# EAGLE board solenoid_board (EAGLE 6.3)
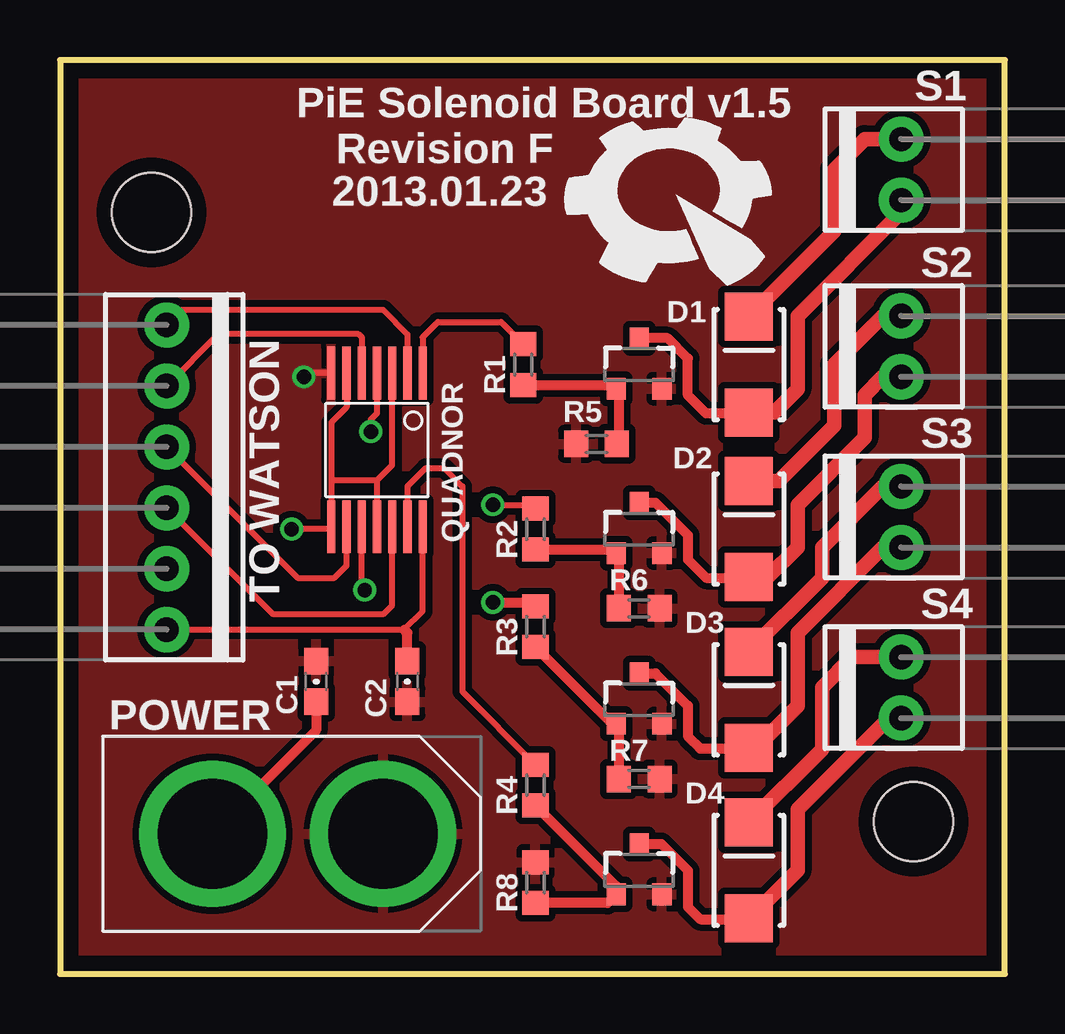
[diagram p0: board, top side]
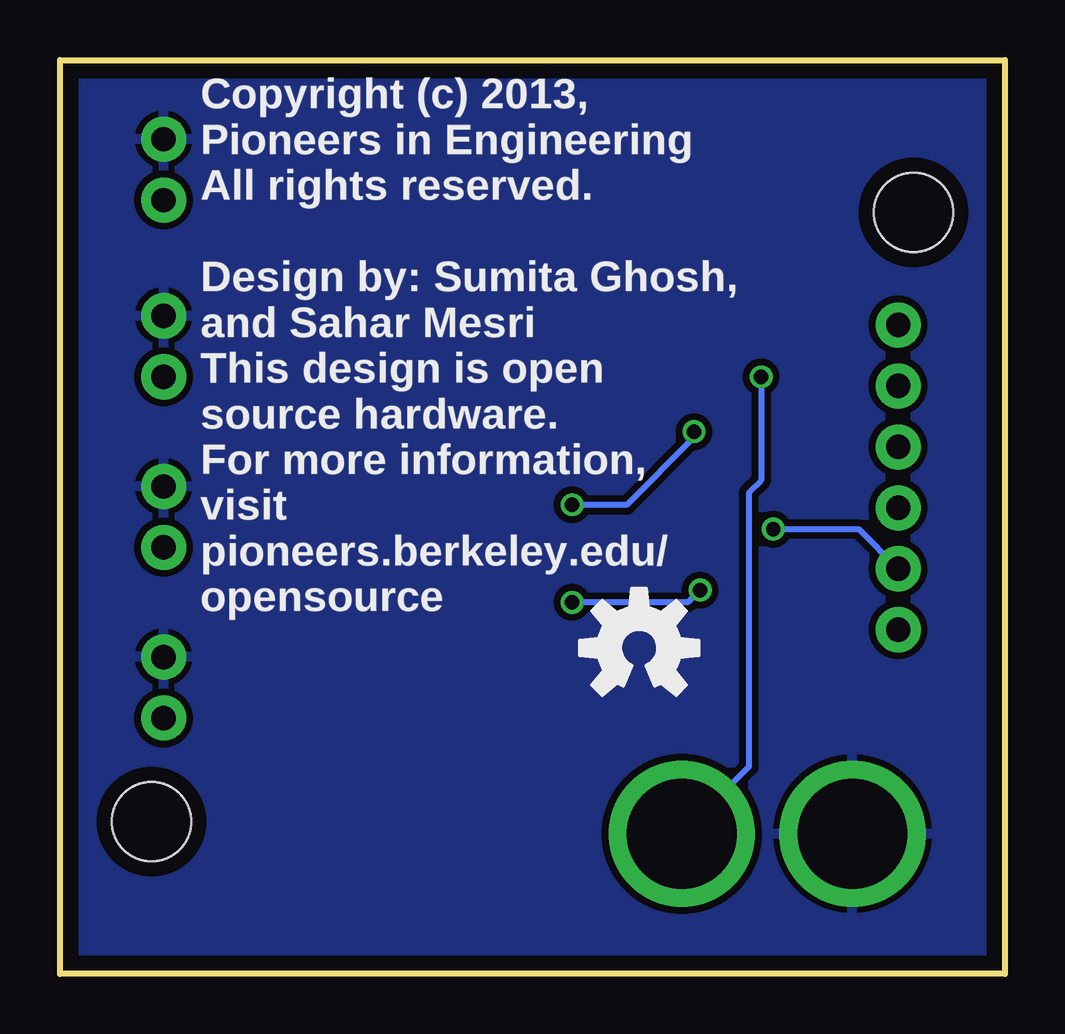
[diagram p1: board, bottom side, seen from below]

Size 39.37 x 38.1 mm. Coordinates in mm from the lower left corner, seen from the top.
Outline: 0,0 39.37,0 39.37,38.1 0,38.1 0,0
Copper layers (1*16): Top 2mil / dielectric 9mil / Bottom 2mil
Design rules "advancedcircuits-33each-pie": minimum track width 6mil, minimum drill 15mil, track to track 6mil, track to pad 10mil, pad to pad 6mil, via to via 6mil, smd to smd 6mil, copper to edge 25mil, drill to drill 7mil, minimum pad ring 7mil, minimum via ring 7mil, stop-mask expansion 3mil, vias tented up to drill 0mil, thermal gap 10mil
Net classes: 1 power: width 0.406 mm, drill 0.381 mm, clearance 0.203 mm

## Footprints (pad centres in the part's own frame; a part is rotated, then mirrored left to right if it is on the bottom)
0603-CAP = smd 1.1 x 1: 1 -0.85,0; 2 0.85,0
SMA-DIODE_ALT = smd 2 x 2: A -2,0; C 2,0
SOT23-3 = smd 0.8 x 0.9: 1 -0.95,-1; 2 0.95,-1; 3 0,1.1
QUADNOR = smd 0.35 x 2.2: 1A -1.27,-3.2; 1B -0.635,-3.2; 1Y -1.905,-3.2; 2A 0.635,-3.2; 2B 1.27,-3.2; 2Y 0,-3.2; 3A 1.905,3.2; 3B 1.27,3.2; 3Y 0.635,3.2; 4A 0,3.2; 4B -0.635,3.2; 4Y -1.27,3.2; GND 1.905,-3.2; VCC -1.905,3.2
R0603 = smd 1 x 1.1: 1 -0.85,0; 2 0.85,0
1X02-MTA = drill 1.016 pad 1.88: 1 -1.27,0; 2 1.27,0
XT60CONNECTOR = drill 4.572 pad 6.096: 12V -3.556,0; GND 3.556,0
STAND-OFF = hole 3.302: 0,0
1X06-MTA = drill 1.016 pad 1.88: 1 -6.35,0; 2 -3.81,0; 3 -1.27,0; 4 1.27,0; 5 3.81,0; 6 6.35,0

## Placement (x,y rotation side)
C1  0.1uF  [0603-CAP]  10.67,12.19 90 top
C2  0.1uF  [0603-CAP]  14.48,12.19 270 top
D1  [SMA-DIODE_ALT]  28.7,25.4 90 top
D2  [SMA-DIODE_ALT]  28.7,18.54 90 top
D3  [SMA-DIODE_ALT]  28.7,11.43 90 top
D4  [SMA-DIODE_ALT]  28.7,4.32 90 top
Q1  MOSFET-NCHANNELSMD  [SOT23-3]  24.13,25.4 0 top
Q2  MOSFET-NCHANNELSMD  [SOT23-3]  24.13,18.54 0 top
Q3  MOSFET-NCHANNELSMD  [SOT23-3]  24.13,11.43 0 top
Q4  MOSFET-NCHANNELSMD  [SOT23-3]  24.13,4.32 0 top
QUADNOR  SN74HC02DBR  [QUADNOR]  13.21,21.84 180 top
R1  330  [R0603]  19.3,25.4 90 top
R2  330  [R0603]  19.81,18.54 270 top
R3  330  [R0603]  19.81,14.48 270 top
R4  330  [R0603]  19.81,7.87 270 top
R5  10k  [R0603]  22.35,22.1 0 top
R6  10k  [R0603]  24.13,15.24 180 top
R7  10k  [R0603]  24.13,8.13 180 top
R8  10k  [R0603]  19.81,3.81 270 top
S1  [1X02-MTA]  35.05,33.53 90 top
S2  [1X02-MTA]  35.05,26.16 90 top
S3  [1X02-MTA]  35.05,19.05 90 top
S4  [1X02-MTA]  35.05,11.94 90 top
U$1  [PIE-LOGO-SMALL]  25.65,32.51 0 top
U$2  XT60CONNECTOR  [XT60CONNECTOR]  9.91,5.84 0 top
U$3  Mounting + Test  [STAND-OFF]  3.81,31.75 0 top
U$4  Mounting + Test  [STAND-OFF]  35.56,6.35 0 top
U$5  [OSHW-LOGO-M]  15.24,13.59 0 bottom
WATSON  [1X06-MTA]  4.45,20.7 270 top

## Library data of the parts
C1 C2 D1-D4 Q1-Q4 R1-R8 U$1 U$3-U$5 = pie
QUADNOR = pie; PARTNUMBER: 296-8204-1-ND
S1-S4 = pie; PARTNUMBER: A1921-ND
U$2 = pie; PARTNUMBER: PRT-10474
WATSON = pie; PARTNUMBER: A1923-ND

## Nets
12V [power]: C1.1 D1.C D2.C D3.C D4.C S1.2 S2.2 S3.2 S4.2 U$2.12V
GATE1: QUADNOR.1Y R1.2
GATE2: QUADNOR.2Y R2.1
GATE3: QUADNOR.3Y R3.1
GATE4: QUADNOR.4Y R4.1
GND: C1.2 C2.2 Q1.2 Q2.2 Q3.2 Q4.2 QUADNOR.GND R5.1 R6.1 R7.1 R8.1 U$2.GND
IO21: QUADNOR.3B WATSON.3
IO61: QUADNOR.1B QUADNOR.2B QUADNOR.3A QUADNOR.4A WATSON.5
IO63: QUADNOR.2A WATSON.2
IO64: QUADNOR.1A WATSON.1
IO65: QUADNOR.4B WATSON.4
N$2: D1.A Q1.3 S1.1
N$3 [power]: D4.A Q4.3 S4.1
N$4 [power]: D3.A Q3.3 S3.1
N$8 [power]: D2.A Q2.3 S2.1
N$15: Q1.1 R1.1 R5.2
N$16: Q2.1 R2.2 R6.2
N$17: Q3.1 R3.2 R7.2
N$18: Q4.1 R4.2 R8.2
VCC: C2.1 QUADNOR.VCC WATSON.6

## Tracks (layer width: path | path; a pad name or v marks a point on that pad's centre or on a via)
12V
  Top 0.406: C1.1 10.67,10.16 U$2.12V
  Top 0.61: D1.C 32.26,30.96 32.26,33.53 33.53,34.8 S1.2 | D2.C 29.94,20.54 32.26,22.86 32.26,25.4 34.29,27.43 S2.2 | D3.C 28.7,13.46 31.75,16.51 31.75,17.78 34.29,20.32 S3.2 | D4.C 31.75,9.37 31.75,11.94 33.02,13.21 S4.2
  pour Bottom (isolate 0.279): 0,38.1 39.37,38.1 39.37,0 0,0
GATE1
  Top 0.254: R1.2 18.38,27.18 15.75,27.18 15.11,26.54 QUADNOR.1Y
GATE2  (via drill 0.6)
  Top 0.254: v18.03,19.56 19.65,19.56 R2.1 | QUADNOR.2Y 13.21,23.37 12.95,23.11 v12.95,22.61
  Bottom 0.254: v12.95,22.61 12.95,22.35 15.75,19.56 v18.03,19.56
GATE3  (via drill 0.6)
  Top 0.254: v12.7,16 12.57,16.13 QUADNOR.3Y
  Top 0.406: v18.03,15.49 19.65,15.49 R3.1
  Bottom 0.254: v18.03,15.49 13.21,15.49 v12.7,16
GATE4
  Top 0.254: 14.54,18.61 14.48,18.54 QUADNOR.4Y 14.48,20.32 15.24,21.08 16,21.08 16.76,20.32 16.76,11.77 R4.1
GND  (via drill 0.6)
  Top 0.254: QUADNOR.GND 10.31,25.04 v10.16,24.89
  Bottom 0.254: v10.16,24.89 10.16,20.57 10.67,20.07 10.67,8.64 U$2.GND
  pour Top (isolate 0.279): 0,38.1 0,0 39.37,0 39.37,38.1
IO21
  Top 0.254: WATSON.3 9.91,16.51 11.43,16.51 11.94,17.02 11.94,18.58 QUADNOR.3B
IO61  (via drill 0.6)
  Top 0.254: 13.21,20.57 QUADNOR.4A | v9.65,18.54 11.2,18.54 QUADNOR.3A 11.3,20.57 | 11.3,20.57 11.3,22.99 11.94,23.62 QUADNOR.2B | 13.21,20.57 11.3,20.57 | 13.21,20.57 13.84,21.21 QUADNOR.1B
  Bottom 0.254: v9.65,18.54 6.1,18.54 WATSON.5
IO63
  Top 0.254: WATSON.2 6.6,26.67 12.45,26.67 12.57,26.54 QUADNOR.2A
IO64
  Top 0.254: QUADNOR.1A 14.48,25.11 14.48,26.67 13.46,27.69 5.08,27.69 WATSON.1
IO65
  Top 0.254: WATSON.4 8.89,14.99 13.46,14.99 13.84,15.37 QUADNOR.4B
N$2
  Top 0.406: D1.A 28.67,23.37 26.92,23.37 26.16,24.13 26.16,25.65 25.32,26.5 Q1.3
  Top 0.61: D1.A 29.75,23.4 30.73,24.38 30.73,27.43 35.05,31.75 S1.1
N$3
  Top 0.406: Q4.3 25.06,5.42 26.16,4.32 26.16,2.79 26.67,2.29 28.67,2.29 D4.A
  Top 0.61: D4.A 28.73,2.32 30.73,4.32 30.73,6.86 34.54,10.67 S4.1
N$4
  Top 0.406: Q3.3 24.81,12.53 26.16,11.18 26.16,9.91 26.67,9.4 28.67,9.4 D3.A
  Top 0.61: D3.A 28.99,9.43 30.73,11.18 30.73,14.22 34.29,17.78 S3.1
N$8
  Top 0.406: Q2.3 24.81,19.64 26.16,18.29 26.16,17.27 26.92,16.51 28.67,16.51 D2.A
  Top 0.61: D2.A 29.5,16.54 30.73,17.78 30.73,19.56 33.53,22.35 33.53,24.13 34.29,24.89 S2.1
N$15
  Top 0.406: R1.1 23.03,24.55 Q1.1 23.28,24.4 23.28,22.18 R5.2
N$16
  Top 0.406: R2.2 23.03,17.69 Q2.1 23.28,17.54 R6.2
N$17
  Top 0.406: R3.2 23.01,10.43 Q3.1 23.28,10.43 R7.2
N$18
  Top 0.406: R4.2 23.18,3.66 Q4.1 22.82,2.96 R8.2
VCC
  Top 0.254: WATSON.6 14.35,14.35 15.11,15.11 QUADNOR.VCC
  Top 0.406: C2.1 14.48,14.22 14.35,14.35

## Text on the board
tPlace: Revision F | 2013.01.23 | TO WATSON | POWER
bPlace: Copyright (c) 2013, / Pioneers in Engineering / All rights reserved. / / Design by: Sumita Ghosh, / and Sahar Mesri / This design is open / source hardware. / For more information, / visit / pioneers.berkeley.edu/ / opensource
tNames: PiE Solenoid Board v1.5